# Altium PCB 收发器V2.0.PcbDoc
Units mil, origin at the board's own origin, x right, y up, seen from the top; angles counter-clockwise.
Board outline 2400 x 1600 mil, 2 copper layers (Top Layer, Bottom Layer); 35 components, 27 nets, 141 pads, 28 vias.
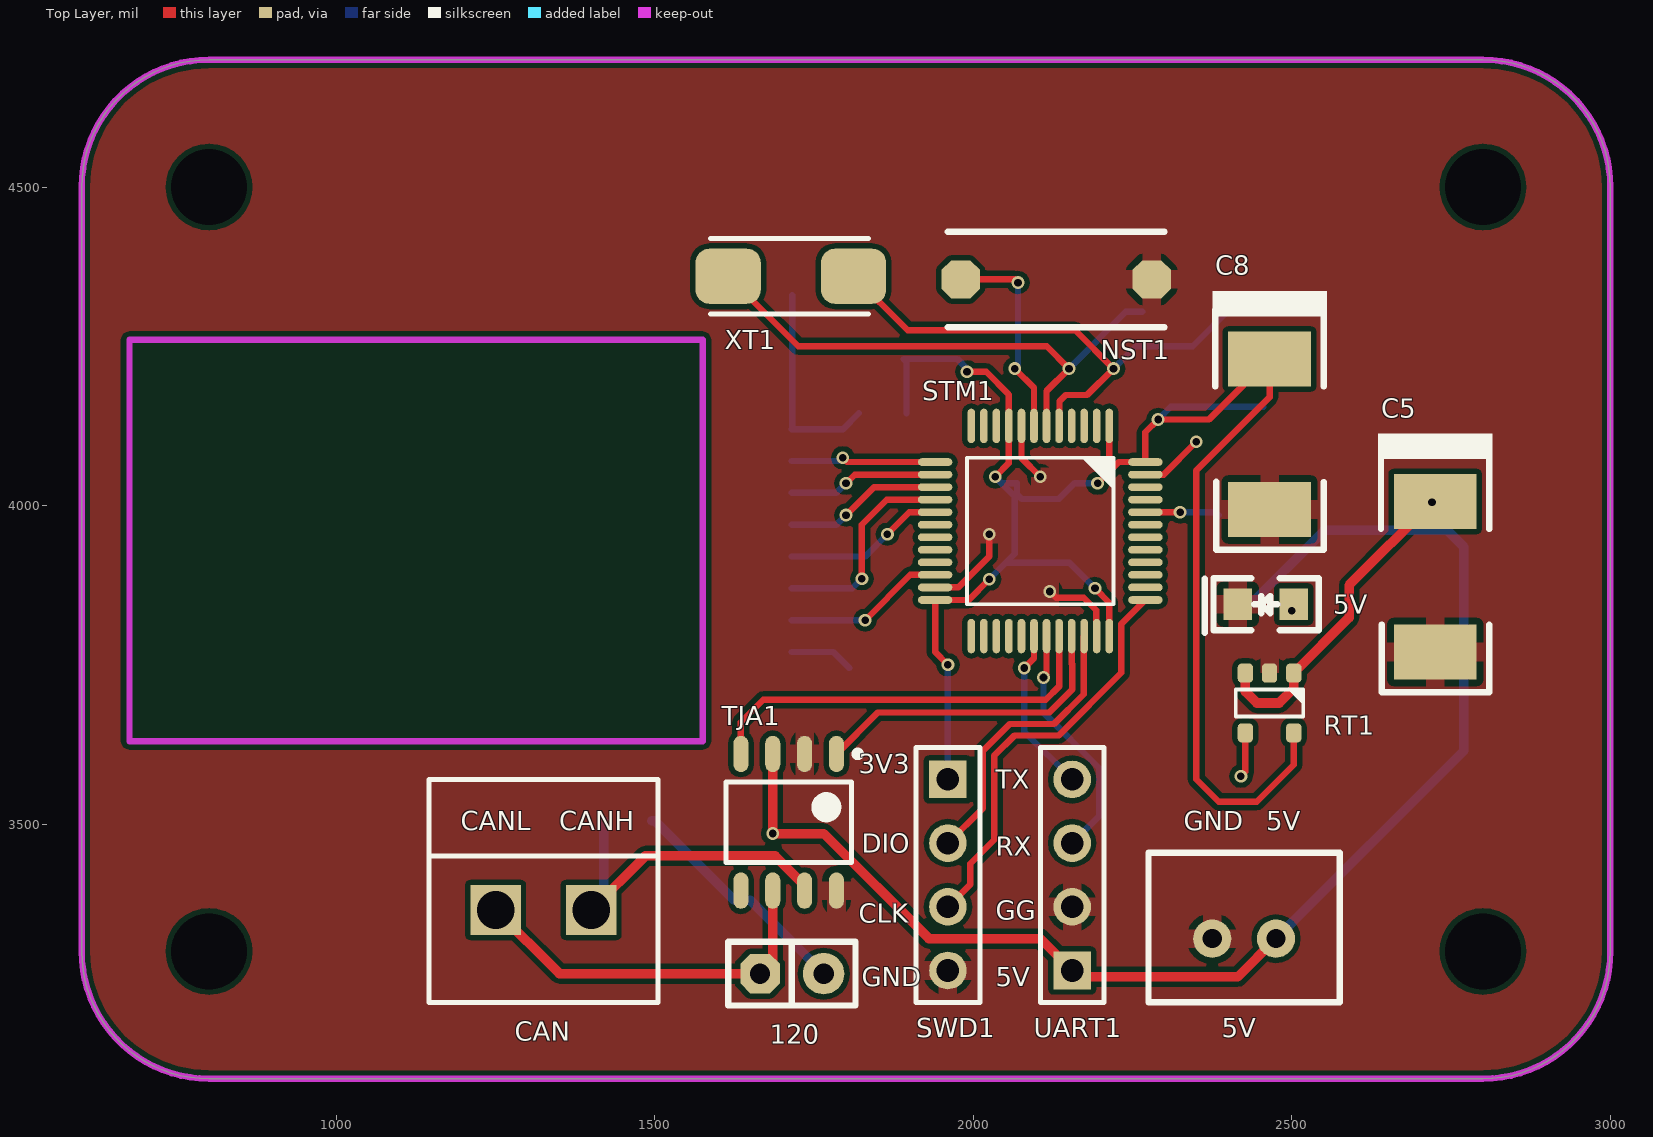
[diagram p0: Top Layer view]
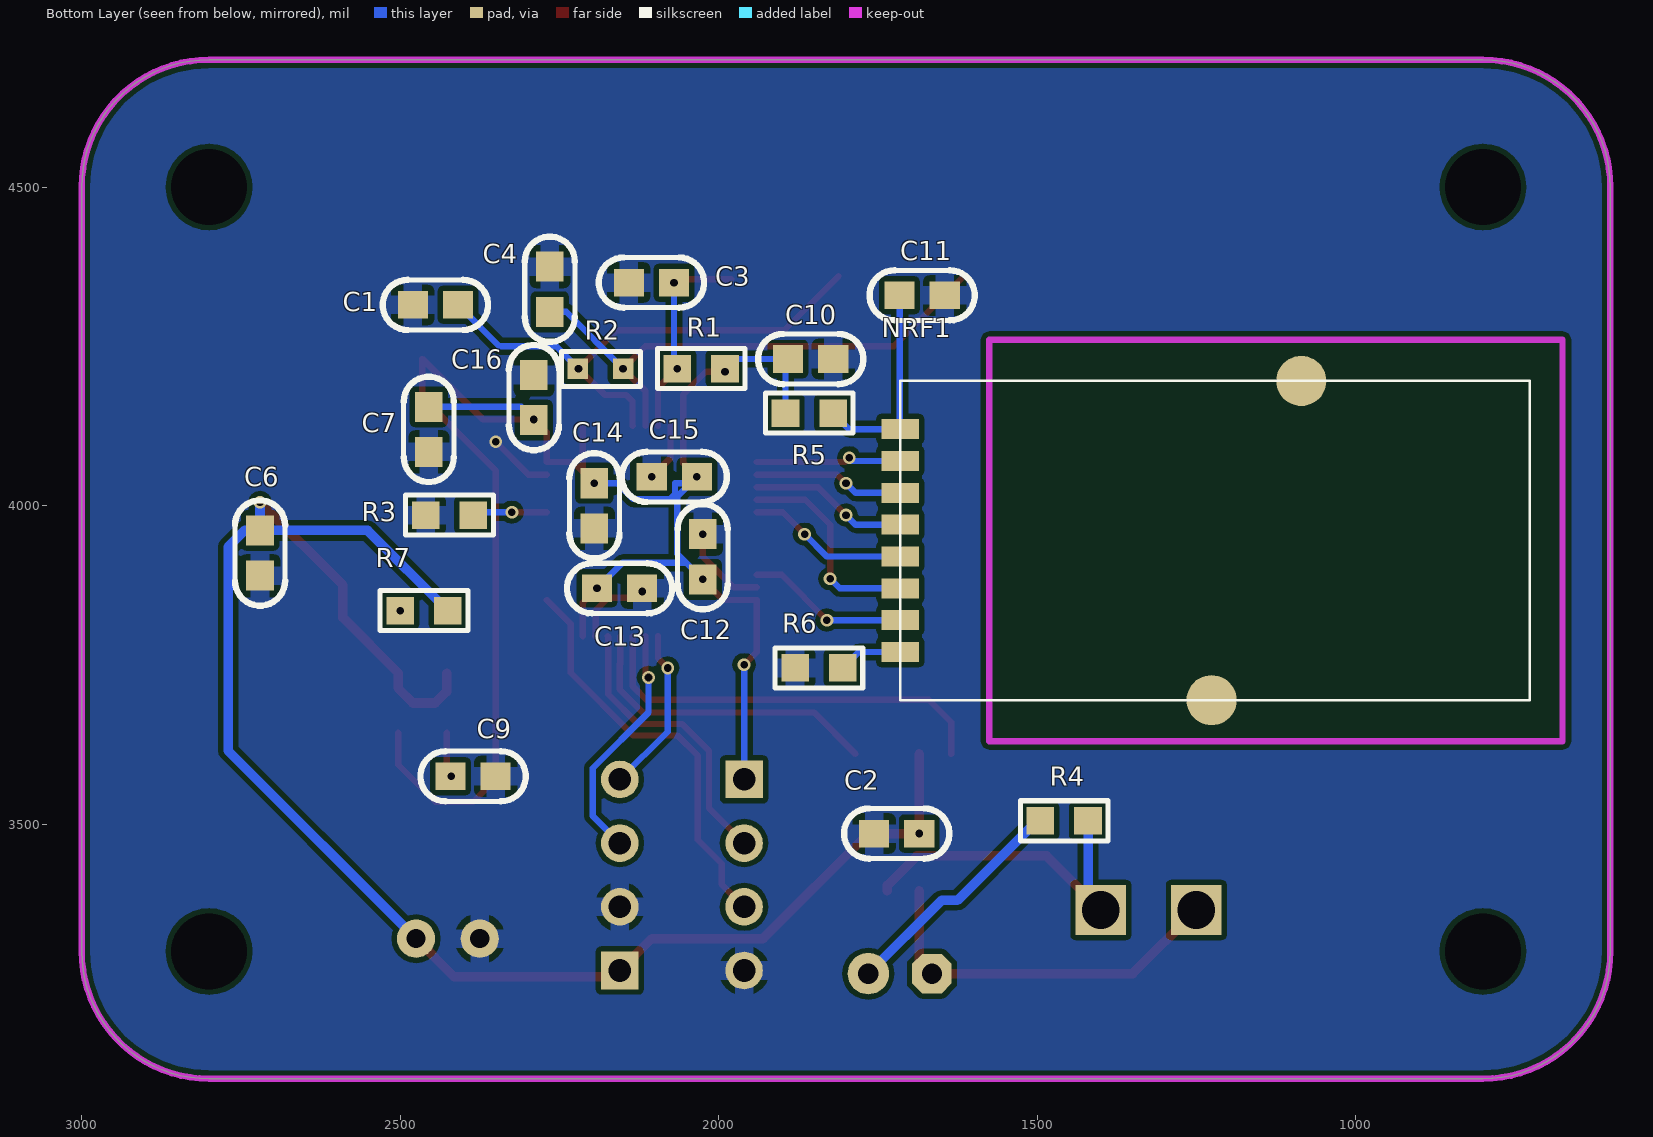
[diagram p1: Bottom Layer view, seen from below]

## Layer stack, top to bottom
Top Solder: solder mask 0.4, Solder Resist, Dk 3.5
Top Layer: signal copper 1.4
Dielectric 1: dielectric 12.6, FR-4, Dk 4.8
Bottom Layer: signal copper 1.4
Bottom Solder: solder mask 0.4, Solder Resist, Dk 3.5

## Board outline
600,3300 600,4500 cw(c800,4500) 800,4700 2800,4700 cw(c2800,4500) 3000,4500 3000,3300 cw(c2800,3300) 2800,3100 800,3100 cw(c800,3300)

## Design rules (kind name [scope] priority, off if disabled: settings)
Clearance [All] p1: gap=8 ignorepadtopadclearanceinfootprint=TRUE
PolygonConnect [All] p1: connectstyle=Relief reliefconductorwidth=30 reliefentries=4 polygonreliefangle="90 Angle" airgapwidth=10
RoutingVias [All] p1: holewidth=28 width=50 viastyle="Through Hole" minholewidth=28 minwidth=50 maxholewidth=28 maxwidth=50
SolderMaskExpansion [All] p1: expansion=4
Width [All] p1: maxlimit=100 minlimit=8 preferedwidth=10 minimp=50.000000 maximp=50.000000 favimp=50.000000
30 further rules are at their usual default settings.

## Components (designator, comment, footprint, x,y, rotation, side; value= is the part's Value field where it differs from the comment)
5V "Header 2" XH-2.54PIN2 -11490,8215 r180 top
5V "lED" 0805D 2503,3845 r180 top
120 "Header 2" SIP2 1765,3265 r180 top
C1 "CAP" CAP-MLCC-0603 2480,4315 r0 bottom value=22PF
C2 "Cap_0603" CAP-MLCC-0603 1685,3485 r180 bottom value=0.1u
C3 "0.1u" CAP-MLCC-0603 2140.87,4350 r0 bottom value=*μF
C4 "CAP" CAP-MLCC-0603 2265,4375 r90 bottom value=22PF
C5 "Cap Pol3" 6032C 2725,4006.22 r90 top value=100uF
C6 "Cap" CAP-MLCC-0603 2720,3960.87 r90 bottom value=0.1uF
C7 "Cap" CAP-MLCC-0603 2455,4155 r90 bottom value=0.1uF
C8 "Cap Pol3" 6032C 2465,4230 r90 top value=100uF
C9 "Cap" CAP-MLCC-0603 2420.87,3575 r0 bottom value=22pF
C10 "0.1μF" CAP-MLCC-0603 1890.87,4230 r0 bottom value=*μF
C11 "1μF" CAP-MLCC-0603 1715.87,4330 r0 bottom value=*μF
C12 "Cap" CAP-MLCC-0603 2025,3955 r90 bottom value=0.1uF
C13 "Cap" CAP-MLCC-0603 2120,3870 r180 bottom value=0.1uF
C14 "Cap" CAP-MLCC-0603 2195,3964.13 r270 bottom value=0.1uF
C15 "Cap" CAP-MLCC-0603 2105,4045 r0 bottom value=0.1uF
C16 "Cap" CAP-MLCC-0603 2290,4205 r90 bottom value=0.1uF
CAN "Header 2" Green_2P 1325,3270 r180 top
NRF1 "NRF24l01_E01_SPI2" E01-ML01SP2 1706.14,3699.17 r180 bottom
NST1 "SW-PB" KEY 2130,4355 r0 top
R1 "RES" RES-0603 2064.8,4215 r0 bottom value=100K
R2 "Res_0603" RES_0603 2187,4133 r0 bottom value=1M
R3 "Res_0603" RES-0603 2460,3985 r0 bottom value=10K
R4 "Res1" RES-0603 1494.8,3505 r0 bottom value=120
R5 "Res1" RES-0603 1895,4145 r0 bottom value=1R
R6 "Res1" RES-0603 1880,3745 r0 bottom value=0
R7 "Res1" RES-0603 2500,3835 r0 bottom value=10K
RT1 "RT9193" SOT23-5 2465,3690 r270 top
STM1 "STM32F072C" LQFP_P0.5_48 2105,3960 r270 top
SWD1 "Header 4" HDR1X4 1960,3570 r270 top
TJA1 "TJA1050" TJA1050 1710,3502.72 r270 top
UART1 "Header 4" HDR1X4 2155,3270 r90 top
XT1 "XTAL_3225_2P" Osc-6032 1713.43,4360 r180 top value=8MHz

## Footprints (in the part's own frame and the unit in brackets; to place one, negate y for a bottom-side part, rotate by r counter-clockwise, add the part's x,y. Pads: shape width x height; smd on the part's side, far side on the other; paste and mask are expansions set on the pad)
0805D [mil]
  rect 45x50 smd: A(0,0) K(88,0)
  silkscreen extent -39,-41 140,45, body extent 5,-25 85,24, height 43
6032C [mm]
  rect 2.2x3.3 smd: 1(0,0) 2(-6,0)
  silkscreen extent -7.6,-2.29 2.72,2.28
CAP-MLCC-0603 [mm]
  rect 1.2x1.1 smd: 1(0,0) 2(-1.8,0)
  silkscreen extent -3,-1 1.2,1, body extent -1.77,-0.47 -0.02,0.48, height 0.85
E01-ML01SP2 [mm]
  rect 1.5x0.8 smd: 1(-0.225,10.689) 2(-0.225,9.419) 3(-0.225,8.149) 4(-0.225,6.879) 5(-0.225,5.609) 6(-0.225,4.339) 7(-0.225,3.069) 8(-0.225,1.799)
  round 2 smd: 10(12.195,-0.121) 11(15.775,12.609)
  silkscreen extent -0.23,-0.12 24.87,12.61
Green_2P [mm]
  rect 2x2 hole 1.5: 1(-1.905,-2.413) 2(1.905,-2.413)
  silkscreen extent -4.57,-7.62 4.57,1.27
HDR1X4 [mm] "Connector; Header; 4 Position"
  rect 1.5x1.5 hole 0.9: 1(0,0)
  round 1.5 hole 0.9: 2(2.54,0) 3(5.08,0) 4(7.62,0)
  silkscreen extent -1.27,-1.27 8.89,1.27
KEY [mil]
  oct 60x60 smd: 1(-150,0) 2(150,0)
  silkscreen extent -170,-75 170,75, body extent -159,-72 162,70, height 98
LQFP_P0.5_48 [mil]
  oval 54x12 smd: 1(-165,108.27) 2(-165,88.58) 3(-165,68.9) 4(-165,49.21) 5(-165,29.53) 6(-165,9.84) 7(-165,-9.84) 8(-165,-29.53) 9(-165,-49.21) 10(-165,-68.9) 11(-165,-88.58) 12(-165,-108.27) 25(165,-108.27) 26(165,-88.58) 27(165,-68.9) 28(165,-49.21) 29(165,-29.53) 30(165,-9.84) 31(165,9.84) 32(165,29.53) 33(165,49.21) 34(165,68.9) 35(165,88.58) 36(165,108.27)
  oval 12x54 smd: 13(-108.27,-165) 14(-88.58,-165) 15(-68.9,-165) 16(-49.21,-165) 17(-29.53,-165) 18(-9.84,-165) 19(9.84,-165) 20(29.53,-165) 21(49.21,-165) 22(68.9,-165) 23(88.58,-165) 24(108.27,-165) 37(108.27,165) 38(88.58,165) 39(68.9,165) 40(49.21,165) 41(29.53,165) 42(9.84,165) 43(-9.84,165) 44(-29.53,165) 45(-49.21,165) 46(-68.9,165) 47(-88.58,165) 48(-108.27,165)
  silkscreen extent -115,-115 115,115, body extent -177,-178 177,177, height 61
Osc-6032 [mm]
  rrect50% 2.6x2.2 smd: 1(2.5,0) 2(-2.5,0)
  silkscreen extent -3.1,-1.5 3.2,1.5, body extent -2.37,-1.6 2.63,1.6, height 1
RES-0603 [mm]
  rect 1.1x1.1 smd: 1(0,0) 2(-1.9,0)
  silkscreen extent -2.7,-0.8 0.8,0.8, body extent -1.8,-0.47 -0.1,0.48, height 0.6
RES_0603 [mil]
  rect 32x32 smd: 1(-37,-82) 2(34,-82)
  silkscreen extent -64,-109 60,-54, body extent -31,-98 31,-66, height 18
SIP2 [mil]
  round 65 hole 32: 1(0,0)
  oct 62x62 hole 32: 2(100,0)
  silkscreen extent -50,-50 150,50
SOT23-5 [mil]
  rrect50% 30x24 smd: 1(-47,38) 2(-47,0) 3(-47,-38) 4(47,-38) 5(47,38)
  silkscreen extent -21,-53 21,53, body extent -55,-57 55,57, height 57
TJA1050 [mm] "SOIC, 8-Leads, Body 4.90x3.90mm, Pitch 1.27mm, IPC Medium Density"
  oval 1.45x0.6 smd: 1(-2.725,1.905) 2(-2.725,0.635) 3(-2.725,-0.635) 4(-2.725,-1.905) 5(2.725,-1.905) 6(2.725,-0.635) 7(2.725,0.635) 8(2.725,1.905)
  silkscreen extent -2.85,-2.5 1.6,2.88, body extent -2,-2.5 2,2.5, height 1.75
XH-2.54PIN2 [mil]
  round 60 hole 30: 1(-13965,4895) 2(-13865,4895)
  silkscreen extent -14065,4760 -13765,4995

## Part data
5V 120 CAN: "Header, 2-Pin", LatestRevisionDate=17-Jul-2002, LatestRevisionNote="Re-released for DXP Platform.", Publisher="Altium Limited"
5V: library part 00-D-LED, "LED"
C1 C4: "无极性电容", LatestRevisionDate=17-Jul-2002, LatestRevisionNote="Re-released for DXP Platform.", PackageDescription="Radial Cap, Thru-Hole; 2 Leads; 0.3 in Pin Spacing", PackageReference=RAD-0.3, Published=8-Jun-2000, Publisher="Altium Limited"
C2 C6 C7 C9 C12 C13 C14 C15 C16: "Capacitor"
  C6 C7 C9 C12 C13 C14 C15 C16: LatestRevisionDate=17-Jul-2002, LatestRevisionNote="Re-released for DXP Platform.", PackageReference=RAD-0.3, Published=8-Jun-2000, Publisher="Altium Limited"
C3 C10 C11: library part CAP, "无极性电容", LatestRevisionDate=17-Jul-2002, LatestRevisionNote="Re-released for DXP Platform.", PackageDescription="Radial Cap, Thru-Hole; 2 Leads; 0.3 in Pin Spacing", PackageReference=RAD-0.3, Published=8-Jun-2000, Publisher="Altium Limited"
C5 C8: "Polarized Capacitor (Surface Mount)", LatestRevisionDate=17-Jul-2002, LatestRevisionNote="Re-released for DXP Platform.", PackageReference=C0805, Published=8-Jun-2000, Publisher="Altium Limited"
NST1: "Switch", LatestRevisionDate=17-Jul-2002, LatestRevisionNote="Re-released for DXP Platform.", PackageDescription="Switch; 2 Leads", PackageReference=SPST-2, Published=24-Mar-1999, Publisher="Altium Limited"
R1: "电阻", LatestRevisionDate=17-Jul-2002, LatestRevisionNote="Re-released for DXP Platform.", PackageDescription="Axial Device, Thru-Hole; 2 Leads; 0.3 in Pin Spacing", PackageReference=AXIAL-0.3, Published=8-Jun-2000, Publisher="Altium Limited"
R2 R3 R4 R5 R6 R7: "Resistor"
  R4 R5 R6 R7: LatestRevisionDate=17-Jul-2002, LatestRevisionNote="Re-released for DXP Platform.", PackageReference=AXIAL-0.3, Published=8-Jun-2000, Publisher="Altium Limited"
RT1: "Power"
STM1: library part STM32F103C, "MCU"
SWD1 UART1: "Header, 4-Pin", LatestRevisionDate=17-Jul-2002, LatestRevisionNote="Re-released for DXP Platform.", Publisher="Altium Limited"
TJA1: "CAN总线收发器"
XT1: "Crystal Oscillator"

## Free pads (board coordinates)
  round 60 hole 119: 6(800,3300) 6(800,4500) 6(2800,3300) 6(2800,4500)

## Via types
v1: diameter 20, hole 12, Top Layer to Bottom Layer, 28 vias

## Nets (pads, with @x,y where several pads share a name; then routed paths per layer and width w, separated by ;. In a path a pad name is that pad's centre, name@x,y a point inside that pad or via, vN(x,y) a via of type N, cw(c..) or ccw(c..) an arc to the next point about the centre after c; other vN are vias at no path point)
3.3V: C7.1 C8.1 C10.1 C12.2 C13.2 C14.2 C15.2 C16.2 R1.2 R5.1 RT1.5 STM1.1 STM1.9 STM1.24 STM1.36 STM1.48 SWD1.1 | length 2983.9
  Top Layer w10: v1(1960,3750) 1940,3770 STM1.24 1992.6,3851.73 v1(2025,3884.13) ; v1(1990,4210) 2020,4210 2055.79,4174.21 STM1.9 2055.79,4066.65 v1(2034.13,4045) ; v1(2190.87,3870) 2213.27,3847.6 STM1.36 ; v1(2195,4035) 2213.27,4053.27 ; STM1.1 2213.27,4053.27 ; RT1.5 2503,3593 2445,3535 2385,3535 2350,3570 2350,4055 2465,4170 C8.1 2370,4135 v1(2290,4135) 2270,4115 STM1.48 2228.27,4068.27 2213.27,4053.27
  Bottom Layer w10: R5.1 1895,4225.87 C10.1 1975,4230 R1.2 ; SWD1.1 v1(1960,3750) ; v1(2025,3884.13) 2050.87,3910 ; v1(2034.13,4045) C15.2@2044.13,4035 ; v1(2190.87,3870) 2150.87,3910 2050.87,3910 ; v1(2195,4035) 2158.66,4035 2134.01,4010.35 2075.99,4010.35 2068.38,4017.96 2068.38,4035 C15.2@2044.13,4035 ; v1(2290,4135) 2310,4155 C7.1 ; C15.2@2044.13,4035 2065,4014.13 2065,3924.13 2050.87,3910
5V: 5V.1 C2.1 C5.1 C6.1 R7.2 RT1.1 RT1.3 TJA1.3 UART1.1 | length 2725.9
  Top Layer w15: TJA1.3 v1(1685,3485) 1765,3485 1930,3320 2105,3320 UART1.1 2165,3260 2415,3260 5V.1 ; RT1.3 2427,3708 2445,3690 2480,3690 2503,3713 RT1.1 2590,3824 2590,3875 v1(2720,4005)
  Bottom Layer w15: R7.2 2551.06,3960.87 C6.1 ; 5V.1 2770,3615 2770,3935 2744.13,3960.87 C6.1 ; v1(2720,4005) C6.1
BOOT0: R3.2 STM1.44 | length 117.7
  Top Layer w10: STM1.44 v1(2324.53,3989.53) v1@2325,3990
  Bottom Layer w10: v1(2324.53,3989.53) 2380.67,3989.53 R3.2
CAN_RX: STM1.32 TJA1.4 | length 651.8
  Top Layer w10: TJA1.4 1635,3660 1670,3695 2113.63,3695 2134.53,3715.9 STM1.32
CAN_TX: STM1.33 TJA1.1 | length 496.4
  Top Layer w10: TJA1.1 1850,3675 2119.09,3675 2155.21,3711.12 2155.21,3750.56 2154.21,3751.56 STM1.33
CANH: CAN.1 R4.2 TJA1.7 | length 545.9
  Top Layer w15: CAN.1 1485,3450 1688.62,3450 1735,3403.62 TJA1.7
  Bottom Layer w15: CAN.1 1420,3385 R4.2
CANL: 120.2 CAN.2 TJA1.6 | length 595.1
  Top Layer w15: CAN.2 1350,3265 120.2 1685,3285 TJA1.6
CE: NRF1.2 STM1.13 | length 229.9
  Top Layer w10: v1(1795,4075) 1801.73,4068.27 STM1.13
  Bottom Layer w10: NRF1.2 1790,4070 v1(1795,4075)
CS: NRF1.3 STM1.14 | length 236.8
  Top Layer w10: v1(1800,4035) 1813.58,4048.58 STM1.14
  Bottom Layer w10: NRF1.3 1785,4020 v1(1800,4035)
GND: 5V.2 5V.K C1.1 C2.2 C3.1 C4.1 C5.2 C6.2 C7.2 C8.2 C9.2 C10.2 C11.2 C12.1 C13.1 C14.1 C15.1 C16.1 NST1.2 R3.1 R6.1 RT1.2 STM1.8 STM1.23 STM1.35 STM1.47 SWD1.4 TJA1.2 TJA1.8 UART1.2 | length 459.5
  Top Layer w10: STM1.23 1976.42,3871.42 2025,3920 v1(2025,3955) ; STM1.8 2075.47,4074.53 v1(2105,4045) ; v1(2120,3865) 2130,3855 2173.34,3855 2192.9,3835.44 2192.9,3795.68 STM1.35 ; STM1.47 2298.58,4048.58 v1(2350,4100)
IRQ: STM1.29
MISO: NRF1.6 STM1.16 | length 332.5
  Top Layer w10: v1(1825,3885) 1825,3970 1864.21,4009.21 STM1.16
  Bottom Layer w10: NRF1.6 1810,3870 v1(1825,3885)
MOSI: NRF1.5 STM1.17 | length 253.8
  Top Layer w10: v1(1865,3955) 1899.53,3989.53 STM1.17
  Bottom Layer w10: NRF1.5 1830,3920 v1(1865,3955)
Net5V_A: 5V.A R7.1
  other v1: 2500,3835
Net120_1: 120.1 R4.1 | length 369.6
  Bottom Layer w15: R4.1 1500,3505 1625,3380 1650,3380 120.1
NetC1_2: C1.2 R2.2 STM1.5 XT1.2 | length 843.8
  Top Layer w10: XT1.2 1896.85,4275 2160,4275 v1(2220,4215) 2178.44,4173.44 2145,4173.44 2135.21,4163.66 2135.21,4125.69 STM1.5
  Bottom Layer w10: v1(2220,4215) 2255,4250 2344.13,4250 C1.2
NetC4_2: C4.2 R2.1 STM1.6 XT1.1 | length 851.5
  Top Layer w10: XT1.1 1725,4250 2115,4250 v1(2150,4215) 2114.84,4179.84 STM1.6
  Bottom Layer w10: v1(2150,4215) 2239.13,4304.13 C4.2
NetC9_1: C9.1 RT1.4 | length 70.9
  Top Layer w10: v1(2420,3575) 2427,3582 RT1.4
NetC11_1: C11.1 NRF1.1 R5.2 | length 325.9
  Bottom Layer w10: C11.1 1715.87,4120.87 NRF1.1 1795.2,4120 R5.2
NetNRF1_8: NRF1.8 R6.2 | length 100.6
  Bottom Layer w10: NRF1.8 1780.2,3770 R6.2
NRST: C3.2 NST1.1 R1.1 STM1.7 | length 331.7
  Top Layer w10: NST1.1 2065,4355 v1(2070,4350) ; v1(2065,4215) 2095.16,4184.84 STM1.7
  Bottom Layer w10: R1.1 2070,4220.2 v1(2070,4350)
PB11: NRF1.7 STM1.22 | length 254.5
  Top Layer w10: v1(1830,3820) 1901.1,3891.1 STM1.22
  Bottom Layer w10: NRF1.7 v1(1830,3820)
SCK: NRF1.4 STM1.15 | length 249.4
  Top Layer w10: v1(1800,3985) 1843.9,4028.9 STM1.15
  Bottom Layer w10: NRF1.4 1785,3970 v1(1800,3985)
SWCLK: STM1.37 SWD1.3 | length 650.9
  Top Layer w10: SWD1.3 1995,3405 1995,3437.33 2033,3475.33 2033,3607.54 2064.46,3639 2134,3639 2232.27,3737.27 2232.27,3814 STM1.37
SWDIO: STM1.34 SWD1.2 | length 454.3
  Top Layer w10: SWD1.2 2015,3525 2015,3615 2057,3657 2126.54,3657 2173.21,3703.67 2173.21,3794.32 STM1.34
USART_RX: STM1.31 UART1.3 | length 380.9
  Top Layer w10: v1(2110,3730) 2114.84,3734.84 STM1.31
  Bottom Layer w10: v1(2110,3730) 2110,3675.14 2197.53,3587.62 2197.53,3512.53 UART1.3
USART_TX: STM1.30 UART1.4 | length 262.3
  Top Layer w10: v1(2080,3745) 2095.16,3760.16 STM1.30
  Bottom Layer w10: v1(2080,3745) 2080,3645 UART1.4
pads on no net: NRF1.10 NRF1.11 STM1.2 STM1.3 STM1.4 STM1.10 STM1.11 STM1.12 STM1.18 STM1.19 STM1.20 STM1.21 STM1.25 STM1.26 STM1.27 STM1.28 STM1.38 STM1.39 STM1.40 STM1.41 STM1.42 STM1.43 STM1.45 STM1.46 TJA1.5

## Polygon pours and split planes (outlines as drawn)
GND on Top Layer "Bottom Layer-No Net" (solid, remove dead copper, pour order 4): 295,2945 320,2970 3350,2970 3350,4670 3175,4845 3095,4765 340,4765
GND on Bottom Layer "Bottom Layer-No Net" (solid, remove dead copper, pour order 6): 330,2815 3300,2815 3340,2855 3235,2960 3235,4850 380,4850 325,4795

## Keep-outs
Keep-Out Layer:
  lines w10: 690,4260 1575,4260 1575,4225 ; 710,4260 675,4260 675,3630 1575,3630 1575,3650 ; 1575,3635 1575,4240 ; 600,3300 ccw(c800,3300) 800,3100 2800,3100 ccw(c2800,3300) 3000,3300 3000,4500 ccw(c2800,4500) 2800,4700 800,4700 ccw(c800,4500) 600,4500 600,3300

## Silkscreen, mask and mechanical layers (free items; w line width, h text height)
Top Overlay:
  text "3V3" at 1820,3580 h30
  text "TX" at 2035,3555 h30
  text "CANL" at 1195,3490 h30
  text "CANH" at 1350,3490 h30
  text "GND" at 2330,3490 h30
  text "5V" at 2460,3490 h30
  text "DIO" at 1825,3455 h30
  text "RX" at 2035,3450 h30
  text "GG" at 2035,3350 h30
  text "CLK" at 1820,3345 h30
  text "GND" at 1825,3245 h30
  text "5V" at 2035,3245 h30